# Altium PCB dianji.PcbDoc
Units mm, origin at the board's own origin, x right, y up, seen from the top; angles counter-clockwise.
Board outline 69.6 x 75.82 mm, 2 copper layers (Top Layer, Bottom Layer); 56 components, 40 nets, 167 pads, 250 vias.
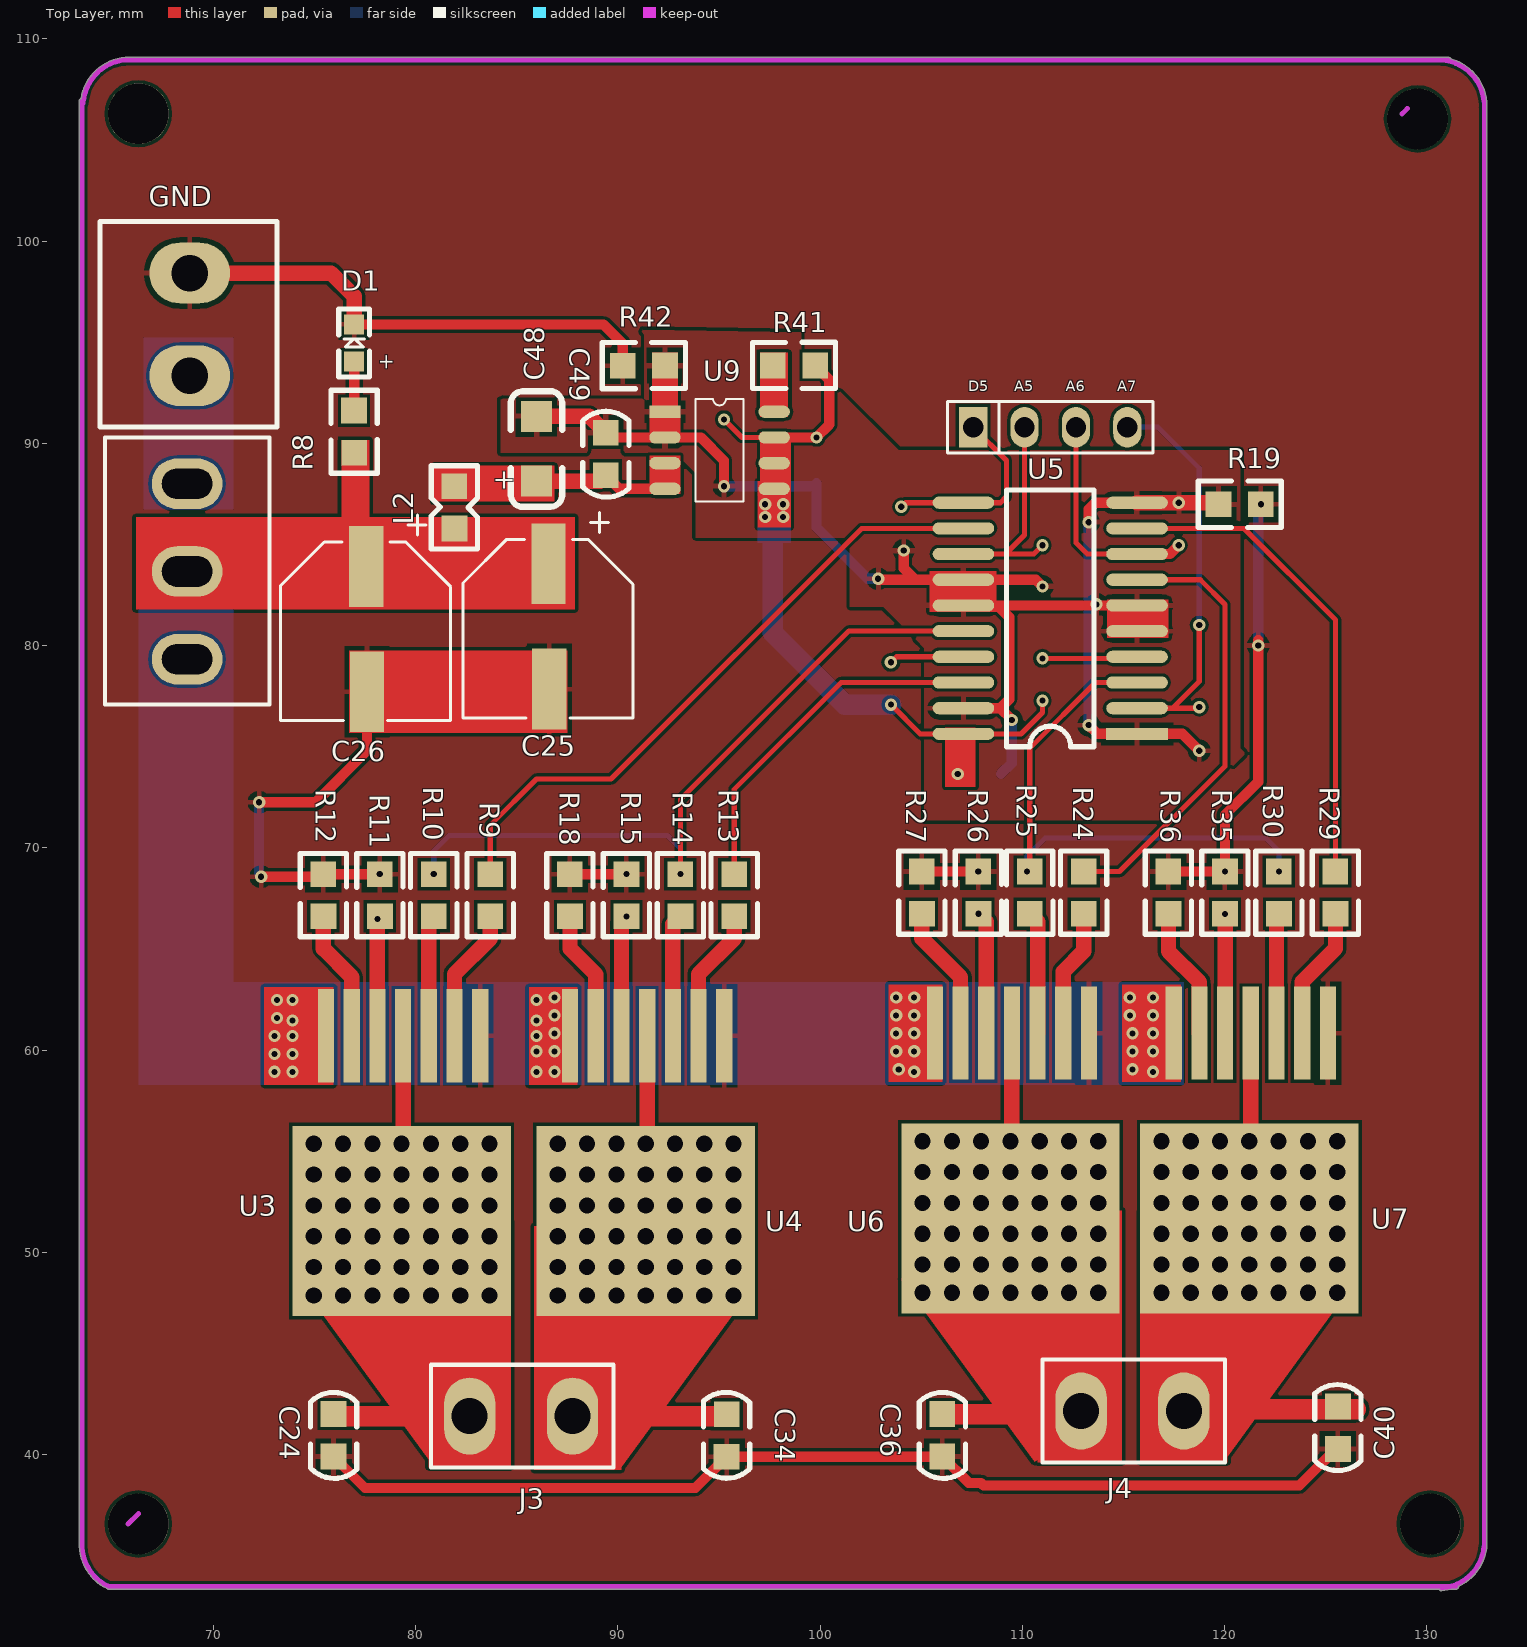
[diagram p0: Top Layer view]
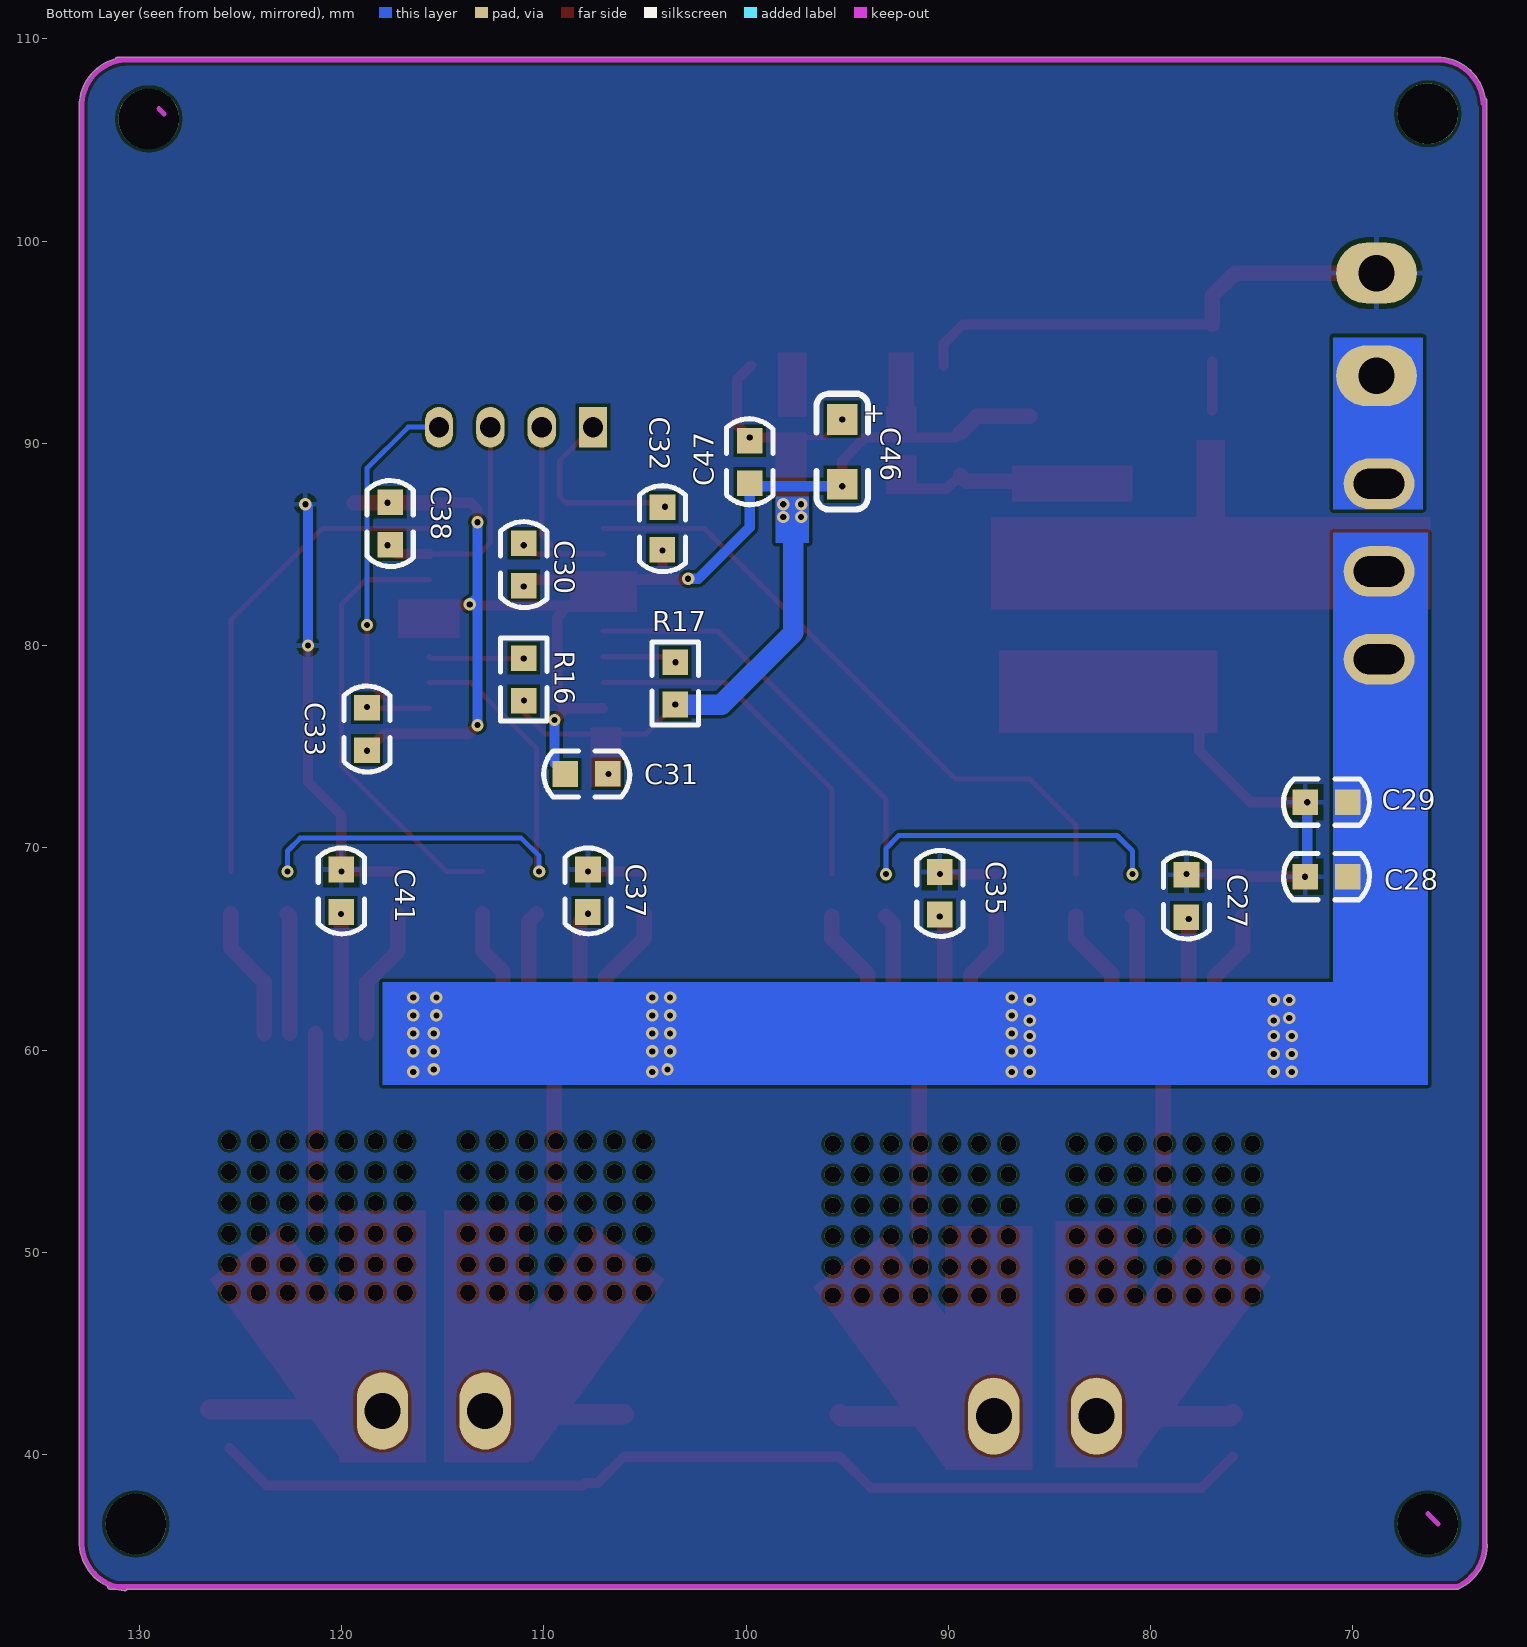
[diagram p1: Bottom Layer view, seen from below]
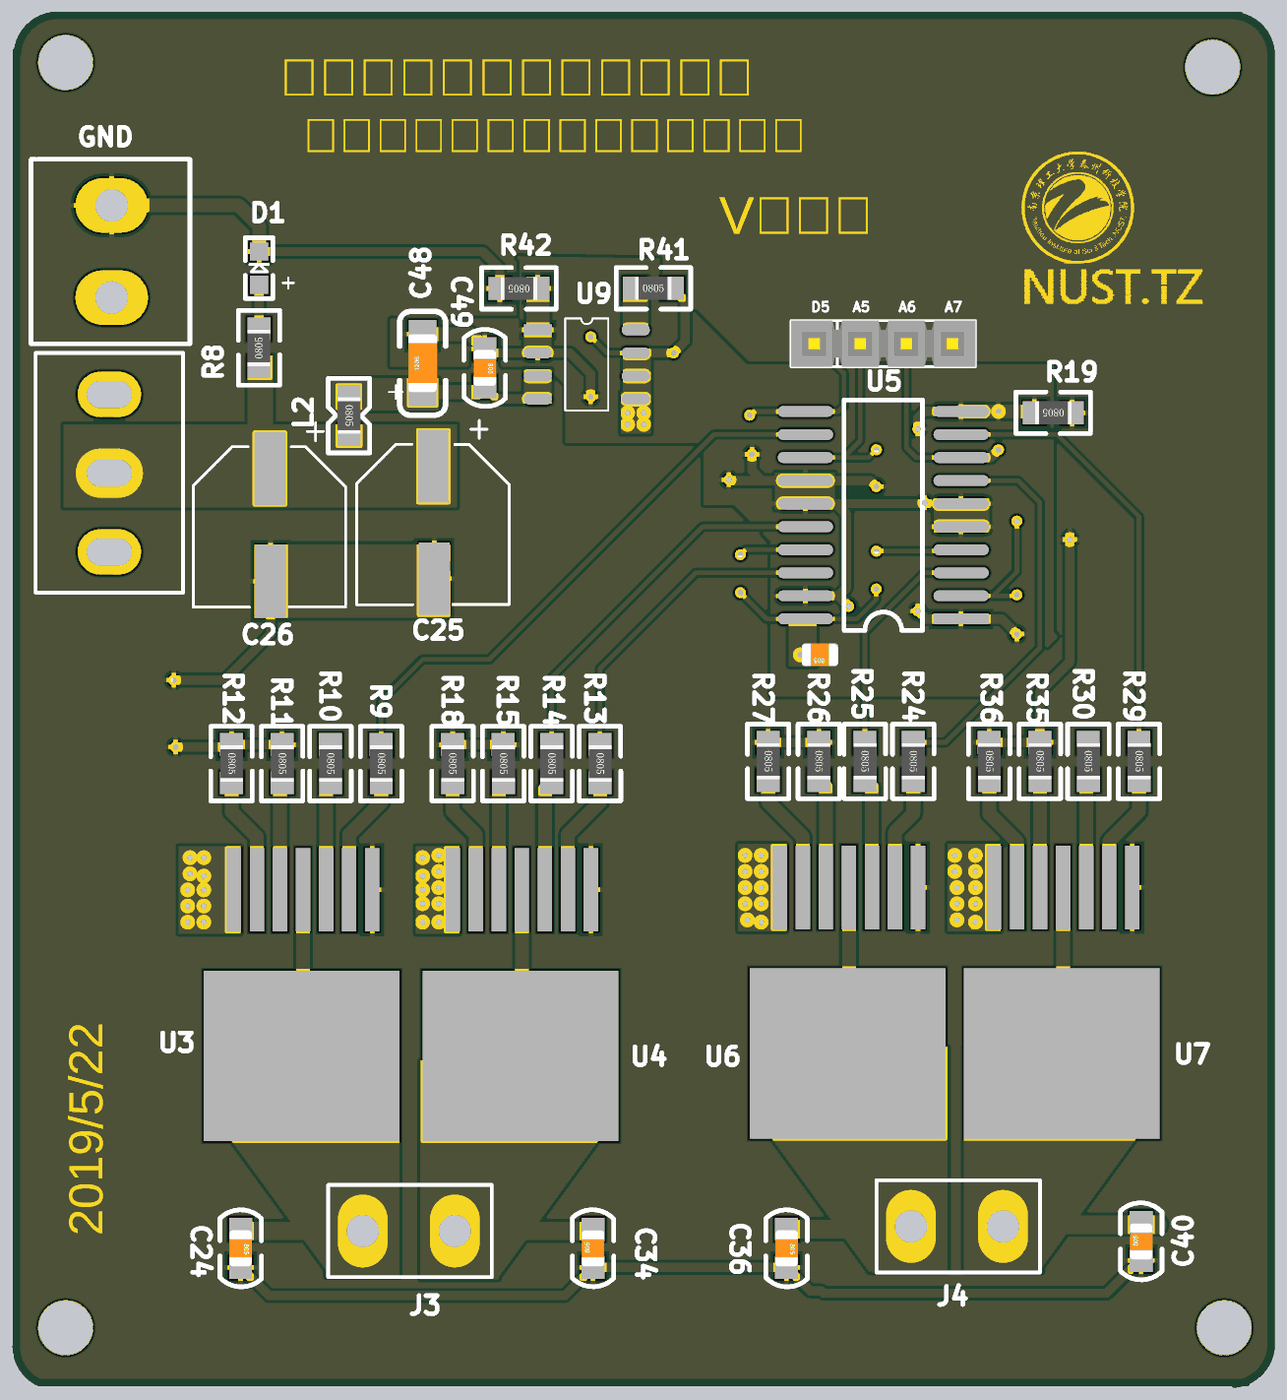
[diagram p2: 3D render of the assembled board from above, using the file's embedded part models]
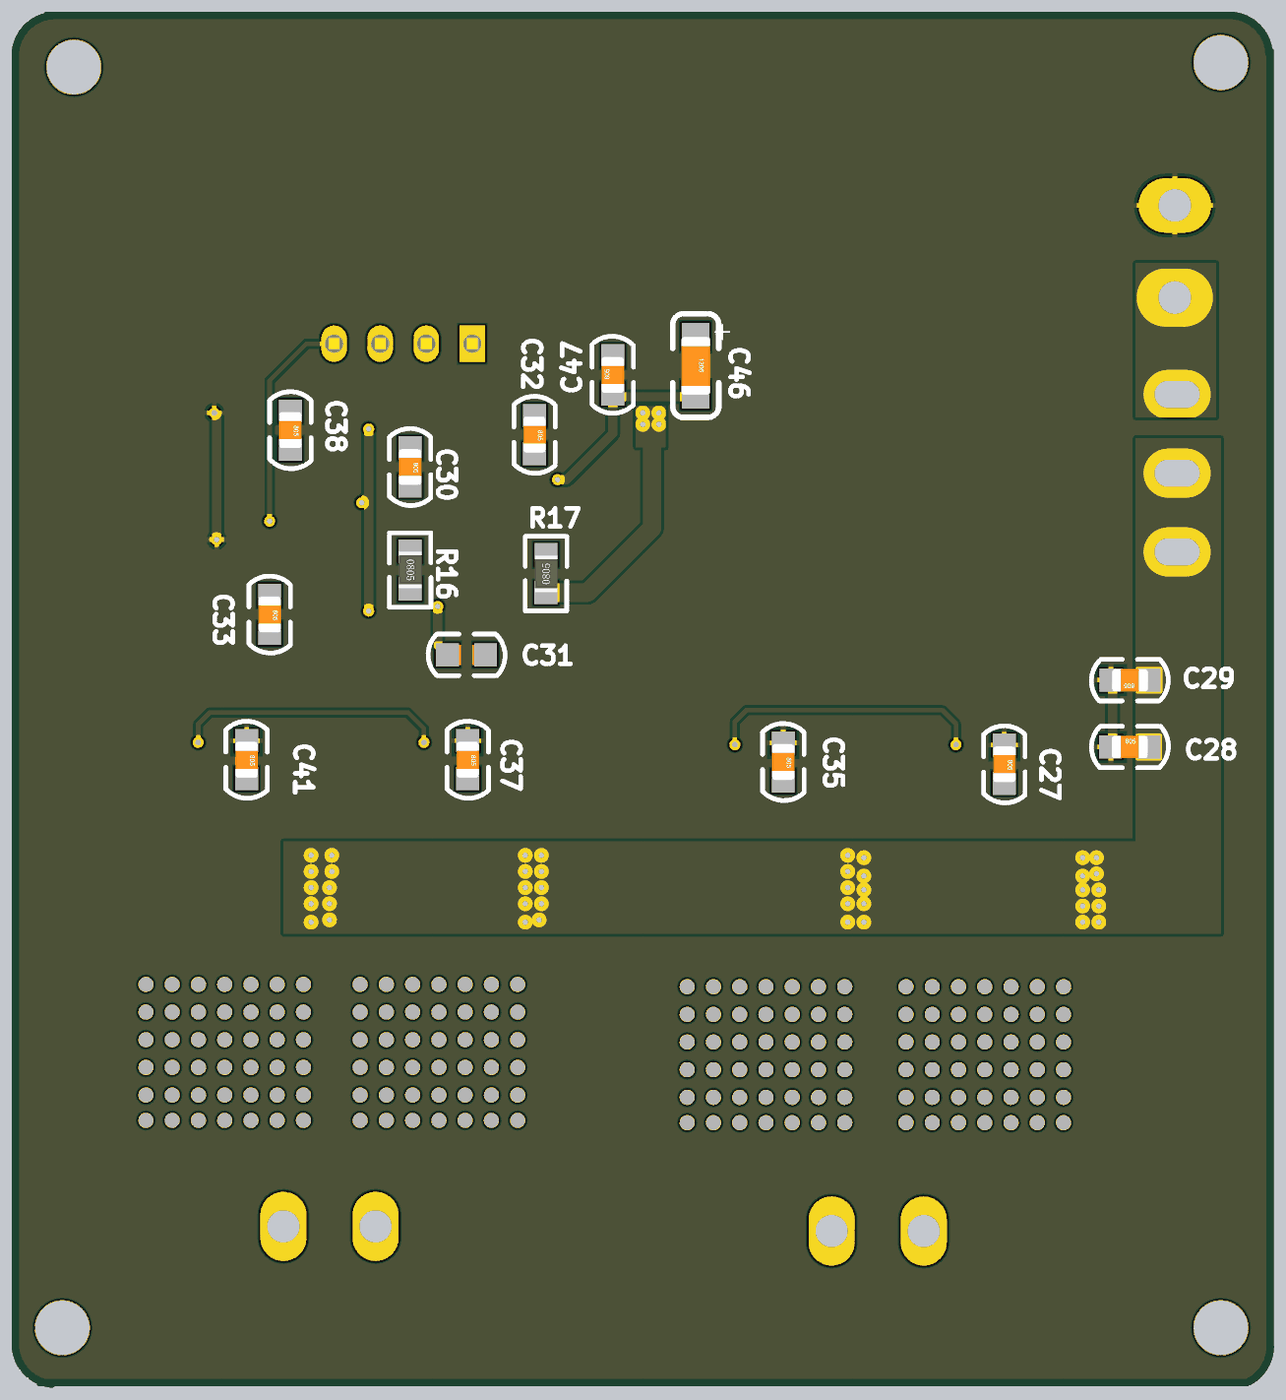
[diagram p3: 3D render of the assembled board from below, using the file's embedded part models]

## Layer stack, top to bottom
Top Solder: solder mask 0.0102, Solder Resist, Dk 3.5
Top Layer: signal copper 0.0356
Dielectric 1: dielectric 0.32, FR-4, Dk 4.8
Bottom Layer: signal copper 0.0356
Bottom Solder: solder mask 0.0102, Solder Resist, Dk 3.5

## Board outline
63.373,35.69 ccw(c65.786,35.56) 64.764,33.37 ccw(c64.818,33.485) 64.818,33.358 130.606,33.358 ccw(c130.725,33.404) 130.735,33.277 ccw(c130.556,35.687) 131.202,33.358 131.445,33.358 ccw(c131.445,33.485) 131.572,33.485 ccw(c131.445,33.485) 131.572,33.494 ccw(c130.556,35.687) 132.969,35.553 ccw(c132.842,35.56) 132.969,35.56 ccw(c132.842,35.56) 132.969,35.561 132.969,106.549 ccw(c130.556,106.68) 132.973,106.68 ccw(c130.556,106.68) 131.182,109.014 ccw(c131.064,108.966) 131.064,109.093 65.659,109.093 ccw(c65.659,108.966) 65.648,109.093 ccw(c65.849,106.684) 63.461,107.055 ccw(c63.5,106.934) 63.373,106.934 63.373,37.084 ccw(c63.5,37.084) 63.373,37.082

## Design rules (kind name [scope] priority, off if disabled: settings)
Clearance [All] p1: gap=0.152
HoleToHoleClearance [All] p1: gap=0 allowstackedmicrovias=TRUE
MinimumSolderMaskSliver [All] p1: minsoldermaskwidth=0.051
PolygonConnect [All] p1: connectstyle=Relief reliefconductorwidth=0.254 reliefentries=4 polygonreliefangle="90 Angle" airgapwidth=0.254
RoutingVias [All] p1: holewidth=0.305 width=0.61 viastyle="Through Hole" minholewidth=0.254 minwidth=0.508 maxholewidth=0.508 maxwidth=1.27
SilkToSilkClearance [All] p1: silktosilkclearance=0
SilkToSolderMaskClearance [IsPad] p1: minsilkscreentomaskgap=0.025 clearancetoexposedcopper=TRUE
SolderMaskExpansion [All] p1: expansion=0.102
UnpouredPolygon [All] p1: allowunpoured=FALSE
Width [All] p1: maxlimit=2.54 minlimit=0.254 preferedwidth=0.254
25 further rules are at their usual default settings.

## Classes and differential pairs
component class dianji: C24 C25 C26 C27 C28 C29 C31 C34 C35 C36 C37 C40 C41 C46 C47 C48 C49 D1 GND J3 J4 L2 R8 R9 R10 R11 R12 R13 R14 R15 R16 R17 R18 R19 R24 R25 R26 R27 R29 R30 R35 R36 R41 R42 U3 U4 U5 U6 U7 U9 ""

## Components (designator, comment, footprint, x,y, rotation, side; value= is the part's Value field where it differs from the comment)
C24 "0.1uF" C0805#1 75.946,42.164 r270 top
C25 "470uF/16V" C8X8MM 86.614,77.851 r270 top
C26 "470uF/16V" C8X8MM 77.597,77.724 r270 top
C27 "0.1uF" C0805#1 78.232,68.834 r270 bottom
C28 "0.1uF" C0805#1 72.517,68.58 r180 bottom
C29 "0.1uF" C0805#1 70.104,72.263 r0 bottom
C30 "0.1uF" C0805#1 110.998,85.217 r270 bottom (schematic designator C27)
C31 "0.1uF" C0805#2 109.093,73.66 r180 bottom
C32 "0.1uF" C0805#1 104.14,86.995 r270 bottom (schematic designator C27)
C33 "0.1uF" C0805#1 118.745,77.089 r270 bottom (schematic designator C27)
C34 "0.1uF" C0805#1 95.377,39.751 r90 top
C35 "0.1uF" C0805#1 90.424,68.961 r270 bottom
C36 "0.1uF" C0805#1 106.045,42.164 r270 top
C37 "0.1uF" C0805#1 107.823,69.088 r270 bottom
C38 "0.1uF" C0805#1 117.602,87.249 r270 bottom (schematic designator C27)
C40 "0.1uF" C0805#1 125.603,40.132 r90 top
C41 "0.1uF" C0805#1 120.015,69.088 r270 bottom
C46 "10uF/16V" C1206 95.25,91.186 r270 bottom
C47 "0.1uF" C0805#1 99.822,87.884 r90 bottom
C48 "10uF/25V" C1206 85.979,88.138 r90 top
C49 "0.1uF" C0805#1 89.408,90.678 r270 top
D1 "LED0" d0603 76.962,94.996 r90 top
GND "Header 2" "PCBComponent_1 - duplicate5" 68.834,93.345 r90 top (schematic designator J2)
J1 "Header 3" 7.2 68.707,88.011 r270 top
J3 "Header 2" 1 82.677,41.91 r0 top
J4 "Header 2" 1 112.903,42.164 r0 top
L2 "" L0805 81.915,87.884 r270 top
R8 "Res1" R0805#1 76.962,89.535 r90 top
R9 "10K" R0805#1 83.693,68.707 r270 top
R10 "10K" R0805#1 80.899,68.707 r270 top
R11 "510R" R0805#1 78.232,68.707 r270 top
R12 "470R" R0805#1 75.438,68.707 r270 top
R13 "10K" R0805#1 95.758,68.707 r270 top
R14 "Res1" R0805#1 93.091,68.707 r270 top
R15 "510R" R0805#1 90.424,68.707 r270 top
R16 "1K" R0805#1 110.998,79.375 r270 bottom
R17 "1K" R0805#2 103.505,77.089 r90 bottom
R18 "470R" R0805#1 87.63,68.707 r270 top
R19 "0" R0805#2 121.793,86.995 r180 top
R24 "10K" R0805#1 113.03,68.834 r270 top
R25 "10K" R0805#1 110.363,68.834 r270 top
R26 "510R" R0805#1 107.823,68.834 r270 top
R27 "470R" R0805#1 105.029,68.834 r270 top
R29 "10K" R0805#1 125.476,68.834 r270 top
R30 "10K" R0805#1 122.682,68.834 r270 top
R35 "510R" R0805#1 120.015,68.834 r270 top
R36 "470R" R0805#1 117.221,68.834 r270 top
R41 "250K" R0805#1 97.663,93.853 r0 top
R42 "0" R0805#1 92.329,93.853 r180 top
U3 "Header 7" BST7970 86.995,64.516 r180 top
U4 "Header 7" BST7970 99.06,64.516 r180 top
U5 "Header 10X2" xin 111.379,74.93 r180 top
U6 "Header 7" BST7970 117.094,64.643 r180 top
U7 "Header 7" BST7970 128.905,64.643 r180 top
U8 "Header 4" SIP4 107.569,90.805 r0 top
U9 "TPS7350" sop8 92.329,91.567 r0 top

## Footprints (in the part's own frame and the unit in brackets; to place one, negate y for a bottom-side part, rotate by r counter-clockwise, add the part's x,y. Pads: shape width x height; smd on the part's side, far side on the other; paste and mask are expansions set on the pad)
1 [mil]
  oval 100x150 hole 70: 1(0,0) 2(200,0)
  silkscreen extent -75,-100 280,100
7.2 [mm]
  oval 2.5x3.5 hole 1.5 slot 2.5 at 90 deg: 1(0,0) 2(4.34,0) 3(8.68,0)
  silkscreen extent -2.29,-4.06 10.92,4.06
BST7970 [mm] "7970"
  rect 0.8x4.6 smd: 1(3.8,3.8) 2(5.07,3.8) 3(6.34,3.8) 4(7.61,3.8) 5(8.88,3.8) 6(10.15,3.8) 7(11.42,3.8)
  rect 10.795x9.398 smd: 4(7.683,12.954)
C8X8MM [mm]
  rect 4x1.7 smd: 1(-6.202,-0.042) 2(0,0)
  silkscreen extent -8.73,-4.27 1.43,4.14, body extent -7.6,-4.2 1.4,4.1, height 10.5
C0805#1 [mil]
  rect 50x50 smd: 1(6,0) 2(88.7,-0.1)
  silkscreen extent -36,-45 131,45, body extent 8,-24 87,25, height 30
C0805#2 [mil]
  rect 50x50 smd: 1(6,0) 2(88.7,0.1)
  silkscreen extent -36,-45 131,45, body extent 8,-25 87,24
C1206 [mil] "3216/A型"
  rect 60x60 smd: 1(0,0) 2(126,0)
  silkscreen extent -50,-50 175,50, body extent 0,-31 126,32, height 39
d0603 [mm]
  rect 1x1 smd: 1(-0.94,0) 2(0.889,0)
  silkscreen extent -1.7,-0.76 1.65,0.76, body extent -1.03,-0.53 0.99,0.53, height 0.46
L0805 [mm] "1/8W"
  rect 1.27x1.27 smd: 1(0,0) 2(2.09,0.005)
  silkscreen extent -1.01,-1.14 3.1,1.15, body extent 0.04,-0.62 2.04,0.64, height 0.55
"PCBComponent_1 - duplicate5" [mm]
  oval 3x4 hole 1.8: 1(0,0) 2(5.08,0)
  silkscreen extent -2.54,-4.32 7.62,4.45
R0805#1 [mm] "1/8W"
  rect 1.27x1.27 smd: 1(0,0) 2(2.09,0.005)
  silkscreen extent -1.01,-1.14 3.1,1.15, body extent 0.04,-0.62 2.04,0.64, height 0.55
R0805#2 [mm] "1/8W"
  rect 1.27x1.27 smd: 1(0,0) 2(2.09,-0.005)
  silkscreen extent -1.01,-1.15 3.1,1.14, body extent 0.04,-0.64 2.04,0.62, height 0.55
SIP4 [mm]
  rect 1.4x2 hole 1: 1(0,0)
  oval 1.4x2 hole 1: 2(2.54,0) 3(5.08,0) 4(7.62,0)
  silkscreen extent -1.27,-1.27 8.89,1.27, body extent -1.27,-1.27 8.89,1.27, height 8.89
sop8 [mil]
  rect 61x24 smd: 1(0,0)
  oval 61x24 smd: 2(0,-50) 3(0,-100) 4(0,-150) 5(212.6,-150) 6(212.6,-100) 7(212.6,-50) 8(212.6,0)
  silkscreen extent 60,-175 153,25
xin [mil]
  rect 120x23.62 smd: 1(-169,-28)
  oval 120x23.62 smd: 2(-169,-78) 3(-169,-128) 4(-169,-178) 5(-169,-228) 6(-169,-278) 7(-169,-328) 8(-169,-378) 9(-169,-428) 10(-169,-478) 11(169,-478) 12(169,-428) 13(169,-378) 14(169,-328) 15(169,-278) 16(169,-228) 17(169,-178) 18(169,-128) 19(169,-78) 20(169,-28)
  silkscreen extent -85,-503 85,-3, body extent -167,-504 169,0, height 104

## Part data
C24 C25 C26 C27 C28 C29 C30 C31 C32 C33 C34 C35 C36 C37 C38 C40 C41 C47 C49: library part Cap, "Capacitor"
C46 C48: library part "Cap Pol1", "Polarized Capacitor (Radial)"
D1: "Typical INFRARED GaAs LED"
GND J3 J4: "Header, 2-Pin"
J1: "Header, 3-Pin"
L2: library part Inductor, "Inductor"
R8 R14: "Resistor"
R9 R10 R11 R12 R13 R15 R16 R17 R18 R19 R24 R25 R26 R27 R29 R30 R35 R36 R41 R42: library part Res1, "Resistor"
U3 U4 U6 U7: "Header, 7-Pin"
U5: "Header, 10-Pin, Dual row"
U8: "Header, 4-Pin"
U9: library part Component_1

## Free pads (board coordinates)
  round 3 hole 3: 0(66.294,36.576) 0(66.294,106.299) 0(129.54,106.045) 0(130.175,36.576)

## Via types
v1: diameter 0.8, hole 0.8, Top Layer to Bottom Layer, 168 vias
v2: diameter 0.61, hole 0.305, Top Layer to Bottom Layer, 82 vias

## Nets (pads, with @x,y where several pads share a name; then routed paths per layer and width w, separated by ;. In a path a pad name is that pad's centre, name@x,y a point inside that pad or via, vN(x,y) a via of type N, cw(c..) or ccw(c..) an arc to the next point about the centre after c; other vN are vias at no path point)
A5: C30.1 U5.13 U8.2 | length 10.8
  Top Layer w0.254: U5.13 109.169,84.531 ; U8.2 110.109,85.471 109.169,84.531 ; v2(110.998,84.963) 110.566,84.531 109.169,84.531
A6: C38.2 U5.8 U8.3 | length 11.2
  Top Layer w0.254: U8.3 112.649,85.09 113.208,84.531 U5.8
  Top Layer w0.508: U5.8 117.297,84.531 v2(117.729,84.963)
A7: C33.1 U5.2 U8.4 | length 19.9
  Top Layer w0.254: U5.2 117.424,76.911 ; v2(118.745,76.962) 118.694,76.911 117.424,76.911 ; v2(118.745,81.026) 118.745,78.232 117.424,76.911
  Bottom Layer w0.254: U8.4 116.713,90.805 118.745,88.773 v2(118.745,81.026)
D5: C32.1 U5.11 U8.1 | length 9.5
  Top Layer w0.254: v2(104.013,86.868) 104.216,87.071 U5.11 108.915,87.071 109.22,87.376 109.22,89.154 U8.1
EN1: R10.1 R14.1 U5.16 | length 36.3
  Top Layer w0.254: v2(93.091,68.707) 93.091,72.39 101.422,80.721 U5.16
  Bottom Layer w0.254: v2(80.899,68.707) 80.899,69.85 81.661,70.612 92.456,70.612 93.091,69.977 v2(93.091,68.707)
EN1_IN: R16.1 U5.4 | length 4.7
  Top Layer w0.254: v2(110.998,79.375) 115.595,79.375 U5.4
EN2: R25.1 R30.1 U5.3 | length 27.6
  Top Layer w0.254: R25.1 110.363,74.93 113.614,78.181 U5.3
  Bottom Layer w0.254: v2(110.236,68.834) 110.236,69.596 111.125,70.485 122.047,70.485 122.682,69.85 v2(122.682,68.834)
EN2_IN: R17.2 U5.17 | length 3.7
  Top Layer w0.254: v2(103.5,79.179) 103.772,79.451 U5.17
GND: C24.2 C25.2 C26.2 C27.1 C28.1 C29.2 C34.1 C35.1 C36.2 C37.1 C40.1 C41.1 D1.2 GND.2 R11.1 R12.1 R15.1 R18.1 R19.1 R26.1 R27.1 R35.1 R36.1 R42.2 U3.1 U4.1 U6.1 U7.1 | length 123.5
  Top Layer w0.508: v2(72.263,72.263) 75.057,72.263 77.597,74.803 C26.2 ; v2(72.365,68.58) 75.311,68.58 R12.1 v2(78.232,68.707) ; C24.2 77.5,38.354 93.828,38.354 C34.1 106.035,39.903 C36.2 107.345,38.608 107.95,38.608 108.077,38.481 123.698,38.481 C40.1@125.539,40.322 ; D1.2 89.281,95.885 90.239,94.927 R42.2 ; R18.1 v2(90.424,68.707) ; R27.1 v2(107.823,68.834) ; R36.1 v2(120.015,68.834) 120.015,71.628 121.666,73.279 v2(121.666,80.01) v2@121.666,80.264
  Top Layer w0.762: GND.2 75.819,98.425 76.962,97.282 D1.2
  Bottom Layer w0.508: v2(72.263,72.263) 72.263,68.682 v2(72.365,68.58) ; v2(121.666,80.01) 121.666,86.868 v2(121.793,86.995)
GND_MCU: C30.2 C31.1 C32.2 C33.2 C38.1 C46.2 C47.1 C48.2 C49.1 R19.2 R42.1 U5.1 U5.5 U5.6 U5.10 U5.14 U5.15 U5.19 U9.1 U9.2 | length 75.5
  Top Layer w0.508: C49.1 89.637,90.297 U9.2 94.107,90.297 95.25,89.154 v2(95.25,87.884) ; v2(102.87,83.312) 102.921,83.261 104.699,83.261 ; v2(104.14,84.709) 104.14,83.82 104.699,83.261 ; U5.19 108.915,76.911 ; U5.15 108.763,81.991 ; v2(109.474,76.327) 109.474,76.352 108.915,76.911 ; v2(110.998,82.931) 110.668,83.261 U5.14 104.699,83.261 ; v2(113.284,76.073) 113.716,75.641 U5.1 117.907,75.641 v2(118.745,74.803) ; v2(113.284,86.106) 113.284,86.741 113.614,87.071 U5.10 ; U5.6 108.763,81.991 ; R19.2@119.377,87.071 R19.2@119.449,87 ; 108.763,81.991 109.347,81.407 109.347,77.343 108.915,76.911
  Top Layer w0.762: C48.2 88.595,91.338 C49.1 ; U5.10 v2(117.729,87.071) R19.2@119.377,87.071
  Bottom Layer w0.508: v2(95.25,87.884) 99.67,87.884 C47.1 99.822,85.852 102.362,83.312 v2(102.87,83.312) ; C31.1 109.474,74.193 v2(109.474,76.327) ; v2(113.284,76.073) 113.284,82.423 ; v2(113.284,86.106) 113.284,82.423 ; v2(113.665,82.042) 113.284,82.423
MOTOR_IN1: R9.1 U5.12 | length 31.9
  Top Layer w0.254: R9.1 83.693,71.12 85.979,73.406 89.662,73.406 102.057,85.801 U5.12
MOTOR_IN2: R13.1 U5.18 | length 17.7
  Top Layer w0.254: R13.1 95.758,72.898 101.041,78.181 U5.18
MOTOR_IN3: R24.1 U5.7 | length 22
  Top Layer w0.254: R24.1 114.808,68.834 120.015,74.041 120.015,82.042 118.796,83.261 U5.7
MOTOR_IN4: R29.1 U5.9 | length 24.1
  Top Layer w0.254: U5.9 120.955,85.801 125.476,81.28 R29.1
NetC24_1: C24.1 J3.1 U3.4 | length 16.8
  Top Layer w0.762: U3.4@79.385,50.673 U3.4@79.385,60.716
  Top Layer w1.016: C24.1 76.048,41.91 J3.1
  other v1: 74.968,47.879 76.416,47.879 77.864,47.879 79.311,47.879 80.759,47.879 82.207,47.879 83.655,47.879 74.968,49.276 76.416,49.276 77.864,49.276 79.311,49.276 80.759,49.276 82.207,49.276 83.655,49.276 74.968,50.8 76.416,50.8 77.864,50.8 79.311,50.8 80.759,50.8 82.207,50.8 83.655,50.8 74.968,52.324 76.416,52.324 77.864,52.324 79.311,52.324 80.759,52.324 82.207,52.324 83.655,52.324 74.968,53.848 76.416,53.848 77.864,53.848 79.311,53.848 80.759,53.848 82.207,53.848 83.655,53.848 74.968,55.372 76.416,55.372 77.864,55.372 79.311,55.372 80.759,55.372 82.207,55.372 83.655,55.372
NetC27_2: C27.2 R11.2 U3.5 | length 6
  Top Layer w0.762: U3.5 v2(78.115,66.495) R11.2
NetC34_2: C34.2 J3.2 U4.4 | length 22.9
  Top Layer w0.762: 91.376,45.529 v1(91.376,50.8) 91.45,50.874 U4.4@91.45,60.716
  Top Layer w1.016: J3.2 95.286,41.91 C34.2
  other v1: 87.033,47.879 88.481,47.879 89.929,47.879 91.376,47.879 92.824,47.879 94.272,47.879 95.72,47.879 87.033,49.276 88.481,49.276 89.929,49.276 91.376,49.276 92.824,49.276 94.272,49.276 95.72,49.276 87.033,50.8 88.481,50.8 89.929,50.8 92.824,50.8 94.272,50.8 95.72,50.8 87.033,52.324 88.481,52.324 89.929,52.324 91.376,52.324 92.824,52.324 94.272,52.324 95.72,52.324 87.033,53.848 88.481,53.848 89.929,53.848 91.376,53.848 92.824,53.848 94.272,53.848 95.72,53.848 87.033,55.372 88.481,55.372 89.929,55.372 91.376,55.372 92.824,55.372 94.272,55.372 95.72,55.372
NetC35_2: C35.2 R15.2 U4.5 | length 6
  Top Layer w0.762: U4.5 90.18,66.368 v2(90.429,66.617)
NetC36_1: C36.1 J4.1 U6.4 | length 16.9
  Top Layer w0.762: v1(109.41,50.927) 109.484,51.001 U6.4@109.484,60.843
  Top Layer w1.016: C36.1 112.751,42.012 J4.1
  other v1: 105.067,48.006 106.515,48.006 107.963,48.006 109.41,48.006 110.858,48.006 112.306,48.006 113.754,48.006 105.067,49.403 106.515,49.403 107.963,49.403 109.41,49.403 110.858,49.403 112.306,49.403 113.754,49.403 105.067,50.927 106.515,50.927 107.963,50.927 110.858,50.927 112.306,50.927 113.754,50.927 105.067,52.451 106.515,52.451 107.963,52.451 109.41,52.451 110.858,52.451 112.306,52.451 113.754,52.451 105.067,53.975 106.515,53.975 107.963,53.975 109.41,53.975 110.858,53.975 112.306,53.975 113.754,53.975 105.067,55.499 106.515,55.499 107.963,55.499 109.41,55.499 110.858,55.499 112.306,55.499 113.754,55.499
NetC37_2: C37.2 R26.2 U6.5 | length 6.1
  Top Layer w0.762: v2(107.828,66.744) 108.214,66.358 U6.5
NetC40_2: C40.2 J4.2 U7.4 | length 18.5
  Top Layer w0.762: v1(121.221,50.927) 121.295,51.001 U7.4@121.295,60.843
  Top Layer w1.016: J4.2 118.077,42.258 126.495,42.258
  other v1: 116.878,48.006 118.326,48.006 119.774,48.006 121.221,48.006 122.669,48.006 124.117,48.006 125.565,48.006 116.878,49.403 118.326,49.403 119.774,49.403 121.221,49.403 122.669,49.403 124.117,49.403 125.565,49.403 116.878,50.927 118.326,50.927 119.774,50.927 122.669,50.927 124.117,50.927 125.565,50.927 116.878,52.451 118.326,52.451 119.774,52.451 121.221,52.451 122.669,52.451 124.117,52.451 125.565,52.451 116.878,53.975 118.326,53.975 119.774,53.975 121.221,53.975 122.669,53.975 124.117,53.975 125.565,53.975 116.878,55.499 118.326,55.499 119.774,55.499 121.221,55.499 122.669,55.499 124.117,55.499 125.565,55.499
NetC41_2: C41.2 R35.2 U7.5 | length 5.9
  Top Layer w0.762: R35.2 v2(120.025,66.739) U7.5
NetC48_1: C48.1 C49.2 L2.1 U9.3 U9.4 | length 6.7
  Top Layer w0.508: C49.2 90.073,87.757 U9.4
  Top Layer w0.762: C48.1 89.118,88.138 C49.2
NetD1_1: D1.1 R8.2 | length 2.4
  Top Layer w0.254: R8.2 R8.2@76.962,91.63
  Top Layer w0.508: R8.2@76.962,91.63 D1.1
NetJ1_1: GND.1 J1.1
NetR9_2: R9.2 U3.2 | length 6.6
  Top Layer w0.762: U3.2 81.925,63.764 83.698,65.537 R9.2
NetR10_2: R10.2 U3.3 | length 6
  Top Layer w0.762: U3.3 80.655,66.368 R10.2
NetR12_2: R12.2 U3.6 | length 6.5
  Top Layer w0.762: R12.2 75.443,65.019 76.845,63.617 U3.6
NetR13_2: R13.2 U4.2 | length 6.6
  Top Layer w0.762: U4.2 93.99,63.764 95.763,65.537 R13.2
NetR14_2: R14.2 U4.3 | length 6.1
  Top Layer w0.762: U4.3 92.72,66.241 R14.2
NetR18_2: R18.2 U4.6 | length 6.4
  Top Layer w0.762: R18.2 87.635,65.019 88.91,63.744 U4.6
NetR24_2: R24.2 U6.2 | length 6.3
  Top Layer w0.762: U6.2 112.024,63.891 113.035,64.902 R24.2
NetR25_2: R25.2 U6.3 | length 6.1
  Top Layer w0.762: R25.2 110.754,66.358 U6.3
NetR27_2: R27.2 U6.6 | length 6.7
  Top Layer w0.762: R27.2 105.034,65.527 106.944,63.617 U6.6
NetR29_2: R29.2 U7.2 | length 6.6
  Top Layer w0.762: U7.2 123.835,63.383 125.481,65.029 R29.2
NetR30_2: R30.2 U7.3 | length 6
  Top Layer w0.762: U7.3 122.565,66.622 R30.2
NetR36_2: R36.2 U7.6 | length 6.5
  Top Layer w0.762: R36.2 117.226,64.892 118.755,63.363 U7.6
NetR41_1: R41.1 U9.8
VCC_7.2V: C25.1 C26.1 C28.2 C29.1 J1.2 J1.3 L2.2 R8.1 U3.7 U4.7 U6.7 U7.7
  other v2: 73.025,58.928 73.914,58.928 85.979,58.928 86.868,58.928 104.648,58.928 116.459,58.928 103.886,59.055 115.443,59.055 73.025,59.817 73.914,59.817 85.979,59.944 86.868,59.944 103.759,59.944 104.648,59.944 115.443,59.944 116.459,59.944 73.025,60.706 73.914,60.706 85.979,60.706 86.868,60.833 103.759,60.833 104.648,60.833 115.443,60.833 116.459,60.833 73.914,61.468 85.979,61.468 73.152,61.595 86.868,61.722 103.759,61.722 104.648,61.722 115.316,61.722 116.459,61.722 73.152,62.484 73.914,62.484 85.979,62.484 86.868,62.611 103.759,62.611 104.648,62.611 115.316,62.611 116.459,62.611
VCC_MCU: C31.2 C46.1 C47.2 R16.2 R17.1 R41.2 U5.20 U9.5 U9.6 U9.7 | length 31.3
  Top Layer w0.254: v2(95.25,91.186) 96.139,90.297 U9.7 ; v2(103.505,77.089) 104.953,75.641 U5.20 109.931,75.641 110.993,76.703 v2(110.993,77.285)
  Top Layer w0.508: U9.7 v2(99.822,90.297) 100.457,90.932 100.457,93.154 R41.2
  Bottom Layer w1.016: 97.663,86.487 97.663,80.645 101.219,77.089 v2(103.505,77.089)
  other v2: 106.807,73.66 97.282,86.36 98.171,86.36 97.282,86.995 98.171,86.995

## Polygon pours and split planes (outlines as drawn)
GND on Top Layer "Top Layer-No Net" (solid, remove dead copper, pour order 4): 52.451,122.047 166.624,122.047 173.99,114.681 145.161,85.852 145.161,20.32 64.389,20.32 62.103,22.606
GND_MCU on Top Layer "Top Layer-No Net" (solid, remove dead copper, pour order 2): 91.059,95.631 91.313,95.377 91.313,92.202 84.328,92.202 83.947,92.583 84.201,92.329 84.201,89.535 92.837,89.535 93.472,88.9 93.853,88.519 93.853,85.344 101.346,85.344 101.6,85.09 101.473,84.963 101.473,81.915 103.124,81.915 104.648,80.391 105.156,79.883 105.156,71.374 117.729,71.374 121.031,74.676 120.777,74.93 120.777,89.662 103.886,89.662 99.187,94.361 99.06,94.488 99.06,95.504
GND on Bottom Layer "Top Layer-No Net" (solid, remove dead copper, pour order 6): 52.451,113.792 53.594,114.935 147.701,114.935 147.701,30.353 144.018,26.67 143.764,26.924 53.086,26.924

## Keep-outs
Keep-Out Layer:
  lines w0.254: 63.5,106.934 63.5,37.084 ; 63.563,106.811 cw(c65.849,106.684) 65.659,108.966 131.064,108.966 ; 65.786,36.576 66.294,37.084 ; 128.778,106.299 129.032,106.553 ; 130.683,108.966 cw(c130.556,106.68) 132.842,106.553 ; 130.725,33.404 ccw(c130.556,35.687) 132.842,35.56 132.842,106.807 ; 131.445,33.485 64.818,33.485 cw(c65.786,35.56) 63.5,35.687 63.5,37.084 ; 63.5,37.084 63.5,37.084

## Other copper
Top Layer:
  rectangle net VCC_MCU: 106.172,73.025 107.696,75.946
  rectangle net GND: 76.708,75.692 87.503,79.756
  rectangle net VCC_MCU: 96.901,85.852 98.552,88.138
  rectangle net GND_MCU: 114.173,80.391 117.221,82.296
  rectangle net GND_MCU: 105.41,81.661 108.712,83.693
  rectangle net NetR41_1: 97.028,91.313 98.425,94.488
  rectangle net VCC_MCU: 97.028,87.376 98.552,90.551
  rectangle net GND_MCU: 91.694,91.186 92.964,94.488
  rectangle net GND_MCU: 91.567,90.043 93.091,91.821
  rectangle net NetC48_1: 91.567,87.503 93.091,89.408
  rectangle net NetC48_1: 80.899,87.122 86.868,88.9
  rectangle net VCC_7.2V: 76.327,84.582 77.724,90.17
  rectangle net VCC_7.2V: 66.167,81.788 87.884,86.36
  region net NetC40_2: 119.95,39.645 126.555,48.69 122.936,51.333 116.331,42.288
  region net NetC34_2: 90.105,39.264 96.71,48.309 93.091,50.952 86.486,41.907
  region net NetC36_1: 114.228,42.279 107.623,51.324 104.004,48.681 110.61,39.636
  region net NetC24_1: 84.444,42.15 77.651,51.451 74.032,48.808 80.825,39.507
  rectangle net NetC40_2: 115.824,39.624 120.142,52.07
  rectangle net NetC36_1: 110.744,39.624 114.935,52.07
  rectangle net NetC34_2: 85.852,39.243 90.17,51.308
  rectangle net NetC24_1: 80.645,39.37 84.709,51.562
  rectangle net VCC_7.2V: 114.935,58.42 117.856,63.246
  rectangle net VCC_7.2V: 103.378,58.42 106.045,63.246
  rectangle net VCC_7.2V: 85.598,58.293 88.011,63.119
  rectangle net VCC_7.2V: 72.517,58.293 75.946,63.119
Bottom Layer:
  rectangle net NetJ1_1: 66.548,86.741 70.993,95.25
  rectangle net VCC_MCU: 96.901,85.09 98.552,87.376
  rectangle net VCC_7.2V: 67.437,58.293 117.983,63.373
  rectangle net VCC_7.2V: 66.294,58.293 70.993,85.598

## Silkscreen, mask and mechanical layers (free items; w line width, h text height)
Top Overlay:
  text "D5" at 107.315,92.583 h0.52
  text "A5" at 109.601,92.583 h0.52
  text "A6" at 112.141,92.583 h0.52
  text "A7" at 114.681,92.583 h0.52
  text "+" at 83.82,87.757 h1
Bottom Overlay:
  text "+" at 93.091,91.059 h1
Top Solder:
  drawing of 2059 lines, arcs and shapes, not listed
  text "南京理工大学泰州科技学院" at 78.08,104.471 h3.3
  text "第十四届恩智浦智能车小白四轮" at 78.664,100.813 h3
  text "V笑面队" at 101.613,96.508 h3.3
  text "2019/5/22" at 68.326,41.656 h3 r90

## Text inside footprints (layer, text, board x,y; h text height)
D1: Top Overlay "+" at 78.867,93.599 h0.76 r90